# EAGLE board pcb_univ_3-2-(1-2)-x-rev1 (EAGLE 5.11)
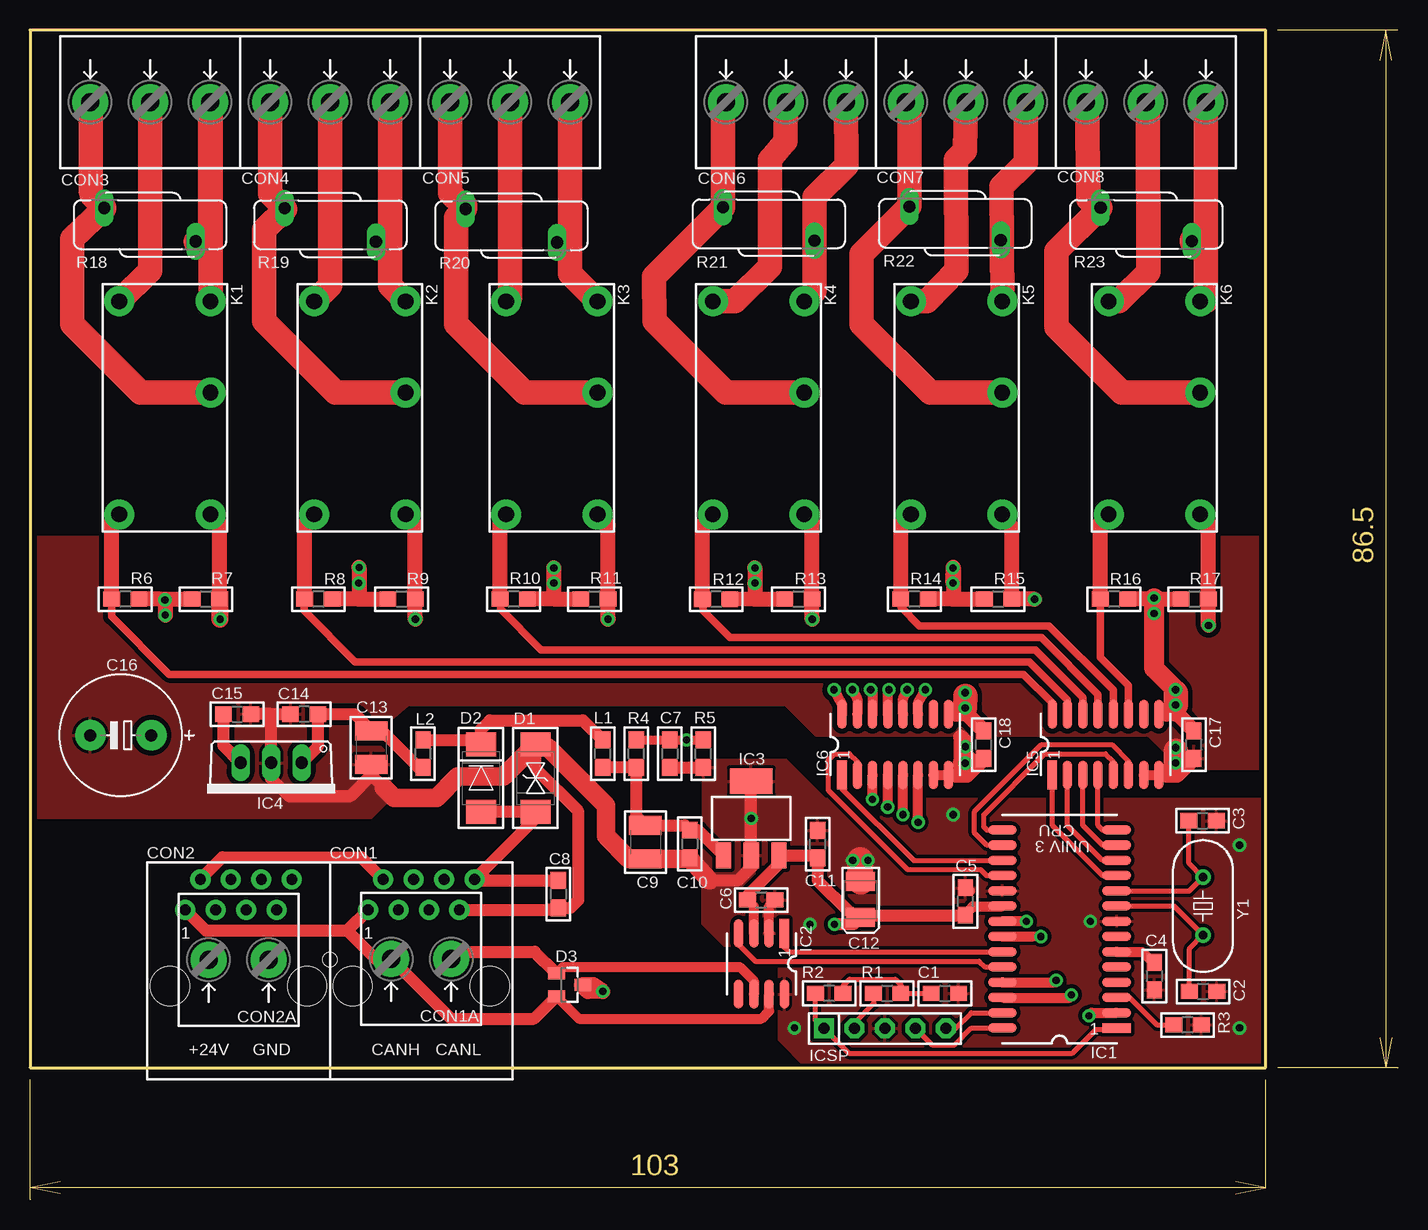
[diagram p0: board, top side]
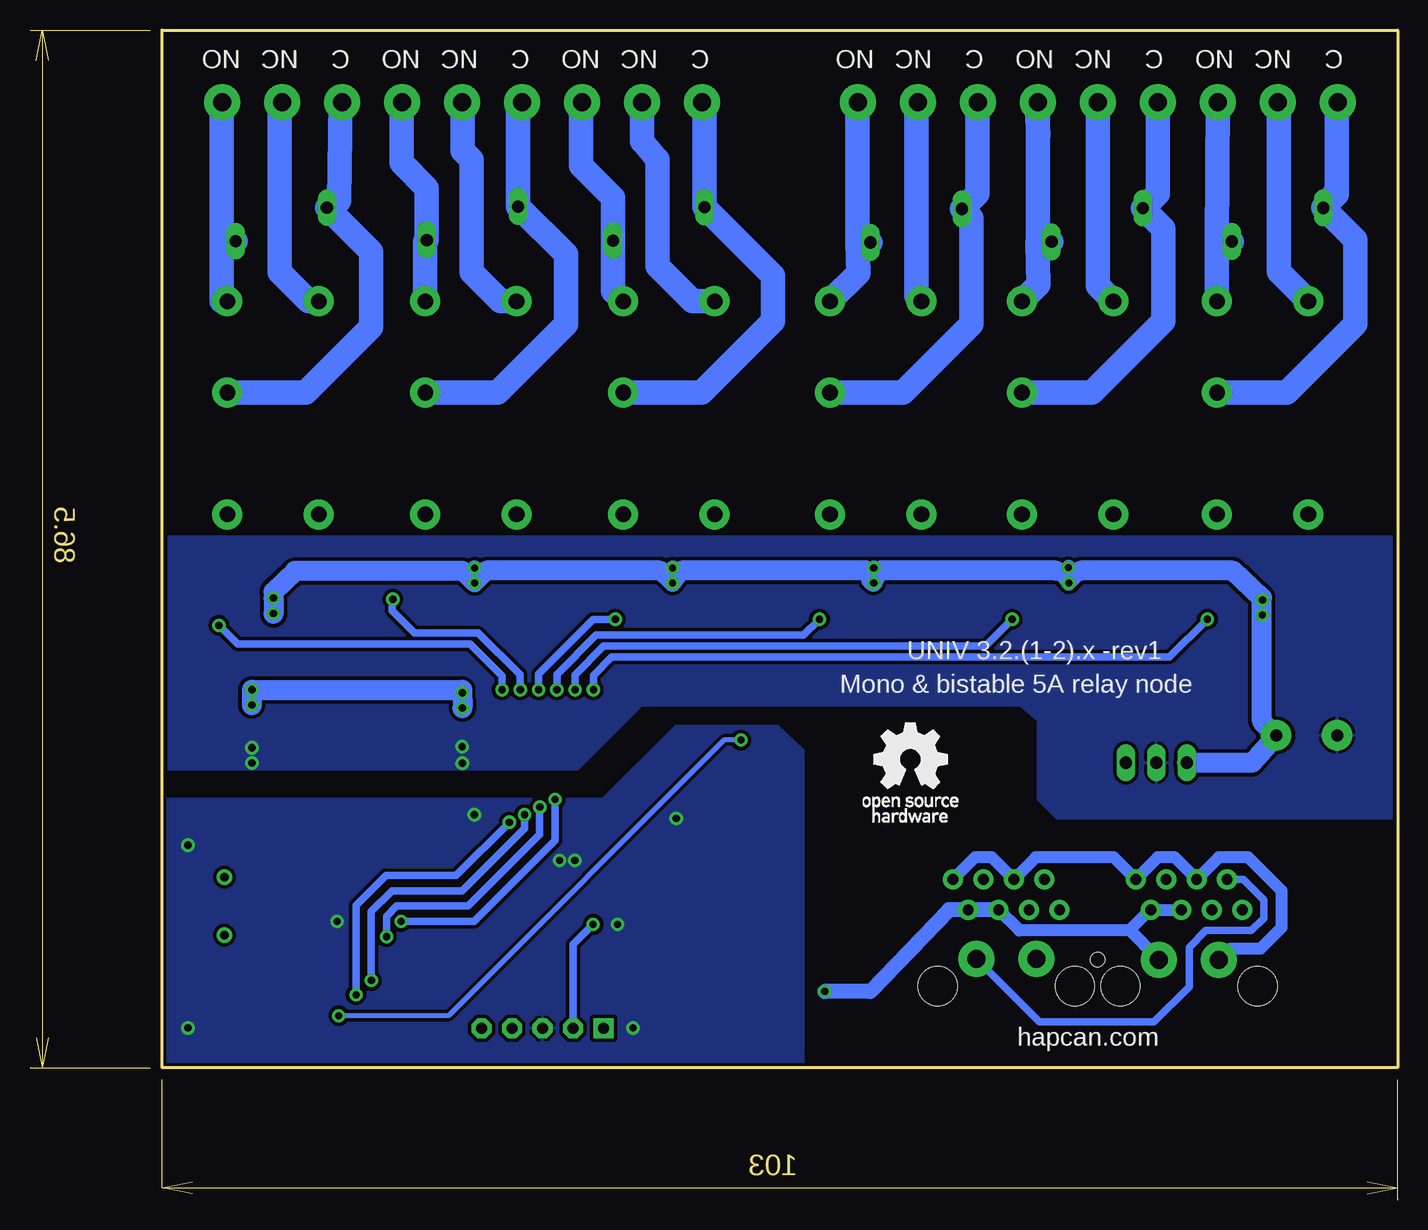
[diagram p1: board, bottom side, seen from below]

Size 114 x 97.5 mm. Coordinates in mm from the lower left corner, seen from the top.
Outline: 113.99,11 114,11 113,11
Outline: 113,11 104,11
Outline: 113,97.5 113,11
Outline: 114,97.5 113,97.5
Outline: 113,97.5 104,97.5
Outline: 113.5,95 113,97.5
Outline: 112.5,13.5 113,11
Outline: 113,97.5 112.5,95
Outline: 113.5,13.5 113,11
Outline: 0,0.01 0,0 0,1
Outline: 0,1 0,10
Outline: 103,1 0,1
Outline: 103,1 103,10
Outline: 100.5,0.5 103,1
Outline: 2.5,1.5 0,1
Outline: 103,1 100.5,1.5
Outline: 2.5,0.5 0,1
Outline: 0,11 103,11 103,97.5 0,97.5 0,11
Copper layers (1*16): Top 0.035mm / dielectric 1.5mm / Bottom 0.035mm
Design rules "hapcan_drc *": minimum track width 10mil, minimum drill 0.5mm, track to track 12mil, track to pad 12mil, pad to pad 12mil, via to via 12mil, smd to smd 0mil, copper to edge 10mil, drill to drill 8mil, minimum pad ring 10mil, minimum via ring 10mil, stop-mask expansion 4mil, vias tented up to drill 0mil, thermal gap 10mil
Holes 1.2 mm at 25,20
tKeepout: 4 lines

## Footprints (pad centres in the part's own frame; a part is rotated, then mirrored left to right if it is on the bottom)
0805 = smd 1.397 x 1.27: 1 -1.143,0; 2 1.143,0
1210 = smd 1.6 x 2.7: 1 -1.4,0; 2 1.4,0
SMC_B = smd 1.6 x 2.4: + -1.5,0; - 1.5,0
CAP-5X10.5 = drill 1.016 pad 2.54 round: + -2.54,0; - 2.54,0
RJ45-PCB-SOCKET = drill 0.9 pad 1.676 round: 1 -4.445,6.35; 2 -3.175,8.89; 3 -1.905,6.35; 4 -0.635,8.89; 5 0.635,6.35; 6 1.905,8.89; 7 3.175,6.35; 8 4.445,8.89 | hole 3.251: -5.715,0; 5.715,0
ARK2-5X10,5MM = drill 1.5 pad 3 round: 1 -2.5,0; 2 2.5,0
ARK3-5X10.5MM = drill 1.5 pad 3 round: 1 -5,0; 2 0,0; 3 5,0
DO-214_TRANSIL2 = smd 2 x 2.5: A 2.82,0; C -2.82,0
DO-214 = smd 2 x 2.5: A 2.82,0; C -2.82,0
SOT-23 = smd 1 x 1.4: 1 -0.95,-1.1; 2 0.95,-1.1; 3 0,1.1
UNIV3CPU = smd 2.4 x 0.8: 1 -4.763,8.255; 2 -4.763,6.985; 3 -4.763,5.715; 4 -4.763,4.445; 5 -4.763,3.175; 6 -4.763,1.905; 7 -4.763,0.635; 8 -4.763,-0.635; 9 -4.763,-1.905; 10 -4.763,-3.175; 11 -4.763,-4.445; 12 -4.763,-5.715; 13 -4.763,-6.985; 14 -4.763,-8.255; 15 4.763,-8.255; 16 4.763,-6.985; 17 4.763,-5.715; 18 4.763,-4.445; 19 4.763,-3.175; 20 4.763,-1.905; 21 4.763,-0.635; 22 4.763,0.635; 23 4.763,1.905; 24 4.763,3.175; 25 4.763,4.445; 26 4.763,5.715; 27 4.763,6.985; 28 4.763,8.255
SO-08 = smd 2.4 x 0.8: 1 -2.54,1.905; 2 -2.54,0.635; 3 -2.54,-0.635; 4 -2.54,-1.905; 5 2.54,-1.905; 6 2.54,-0.635; 7 2.54,0.635; 8 2.54,1.905
SOT-223 = smd 1.27 x 2.159: 1 -2.311,-3.099; 2 0,-3.099; 3 2.311,-3.099 | smd 3.556 x 2.159: 4 0,3.099
TO220V = drill 1.016 long: 1 -2.54,0; 2 0,0; 3 2.54,0
SO-16 = smd 2.4 x 0.8: 1 -2.54,4.445; 2 -2.54,3.175; 3 -2.54,1.905; 4 -2.54,0.635; 5 -2.54,-0.635; 6 -2.54,-1.905; 7 -2.54,-3.175; 8 -2.54,-4.445; 9 2.54,-4.445; 10 2.54,-3.175; 11 2.54,-1.905; 12 2.54,-0.635; 13 2.54,0.635; 14 2.54,1.905; 15 2.54,3.175; 16 2.54,4.445
SIP-5 = drill 0.9 pad 1.676 square: 1 -5.08,0 | drill 0.9 pad 1.676 octagon: 2 -2.54,0; 3 0,0; 4 2.54,0; 5 5.08,0
RELAY_PE = drill 1.3 pad 2.5 round: 11 -1.27,3.81; 12 -8.89,-3.81; 14 -8.89,3.81; A1 8.89,3.81; A2 8.89,-3.81
0805@1 = smd 1.397 x 1.27: 1 -1.143,0; 2 1.143,0
S10K = drill 1.016 long: 1 -1.397,-3.81; 2 1.397,3.81
CRYSTAL-HC49V = drill 0.7 pad 1.27 round: 1 -2.413,0; 2 2.413,0

## Placement (x,y rotation side)
C1  100n  [0805]  76.27,17.19 0 top
C2  22p  [0805]  97.79,17.35 0 top
C3  22p  [0805]  97.74,31.57 0 top
C4  10u/16V  [0805]  93.73,18.62 270 top
C5  100n  [0805]  77.98,24.85 90 top
C6  100n  [0805]  60.96,24.97 0 top
C7  100n  [0805]  53.34,37.16 270 top
C8  100n  [0805]  44.04,25.47 270 top
C9  10u/50V  [1210]  51.31,29.8 270 top
C10  100n  [0805]  55,29.65 270 top
C11  100n  [0805]  65.66,29.62 90 top
C12  10u/16V  [SMC_B]  69.24,25.02 90 top
C13  10u/50V  [1210]  28.45,37.67 270 top
C14  100n  [0805]  22.86,40.46 180 top
C15  100n  [0805]  17.27,40.46 0 top
C16  1000u/16V  [CAP-5X10.5]  7.57,38.7 180 top
C17  100n  [0805]  97.03,37.92 90 top
C18  100n  [0805]  79.5,37.92 90 top
CON1  [RJ45-PCB-SOCKET]  32.62,17.8 0 top
CON1A  TERMINAL-2  [ARK2-5X10,5MM]  32.62,20.06 180 top
CON2  [RJ45-PCB-SOCKET]  17.38,17.8 0 top
CON2A  TERMINAL-2  [ARK2-5X10,5MM]  17.38,19.99 180 top
CON3  TERMINAL-3-5X10.5MM  [ARK3-5X10.5MM]  10,91.5 0 top
CON4  TERMINAL-3-5X10.5MM  [ARK3-5X10.5MM]  25,91.5 0 top
CON5  TERMINAL-3-5X10.5MM  [ARK3-5X10.5MM]  40,91.5 0 top
CON6  TERMINAL-3-5X10.5MM  [ARK3-5X10.5MM]  63,91.5 0 top
CON7  TERMINAL-3-5X10.5MM  [ARK3-5X10.5MM]  78,91.5 0 top
CON8  TERMINAL-3-5X10.5MM  [ARK3-5X10.5MM]  93,91.5 0 top
D1  P6SMB33CA  [DO-214_TRANSIL2]  42.14,35.13 90 top
D2  S1D  [DO-214]  37.59,35.13 270 top
D3  PESD2CAN  [SOT-23]  44.98,17.9 270 top
IC1  UNIV 3 CPU  [UNIV3CPU]  85.83,22.56 180 top
IC2  MCP2561-E/SN  [SO-08]  60.98,19.66 270 top
IC3  MCP1790-5002EDB  [SOT-223]  60.12,31.77 0 top
IC4  7812  [TO220V]  20.09,36.41 180 top
IC5  ULN2003  [SO-16]  89.66,37.92 90 top
IC6  ULN2003  [SO-16]  72.14,37.92 90 top
ICSP  [SIP-5]  71.27,14.26 0 top
K1  [RELAY_PE]  11.25,66 270 top
K2  [RELAY_PE]  27.5,66 270 top
K3  [RELAY_PE]  43.5,66 270 top
K4  [RELAY_PE]  60.74,66 270 top
K5  [RELAY_PE]  77.25,66 270 top
K6  [RELAY_PE]  93.74,66 270 top
L1  BLM21A102SPT  [0805@1]  47.75,37.16 90 top
L2  BLM21A102SPT  [0805@1]  32.77,37.16 90 top
R1  10k  [0805]  71.45,17.19 0 top
R2  470R  [0805]  66.62,17.19 180 top
R3  10k  [0805]  96.5,14.56 180 top
R4  51k 1%  [0805]  50.55,37.16 90 top
R5  10k 1%  [0805]  56.13,37.16 90 top
R6  75R  [0805]  7.95,50.06 180 top
R7  75R  [0805]  14.67,50.06 0 top
R8  75R  [0805]  24.04,50.06 180 top
R9  75R  [0805]  30.98,50.06 0 top
R10  75R  [0805]  40.32,50.06 180 top
R11  75R  [0805]  47.05,50.06 0 top
R12  75R  [0805]  57.2,50.03 180 top
R13  75R  [0805]  64.06,50.06 0 top
R14  75R  [0805]  73.73,50.06 180 top
R15  75R  [0805]  80.7,50.06 0 top
R16  75R  [0805]  90.37,50.06 180 top
R17  75R  [0805]  97.09,50.06 0 top
R18  VAR10-250  [S10K]  10,81.27 270 top
R19  VAR10-250  [S10K]  25.03,81.24 270 top
R20  VAR10-250  [S10K]  40.12,81.19 270 top
R21  VAR10-250  [S10K]  61.59,81.34 270 top
R22  VAR10-250  [S10K]  77.11,81.39 270 top
R23  VAR10-250  [S10K]  93.05,81.29 270 top
Y1  8MHz  [CRYSTAL-HC49V]  97.79,24.46 90 top

## Library data of the parts
C1-C18 CON1 CON1A CON2 CON2A CON3-CON8 D1-D3 IC1-IC6 ICSP K1-K6 L1 L2 R1-R23 Y1 = HAPCAN_devices - UNIV3

## Nets
+5V: C5.1 C6.1 C11.1 C12.+ IC1.20 IC2.3 IC3.3 ICSP.2 R1.1
+12V: C15.1 C16.+ C17.2 C18.2 IC4.3 IC5.9 IC6.9 R6.1 R7.1 R8.1 R9.1 R10.1 R11.1 R12.1 R13.1 R14.1 R15.1 R16.1 R17.1
GND: C1.2 C2.2 C3.2 C4.2 C5.2 C6.2 C7.2 C8.2 C9.2 C10.2 C11.2 C12.- C13.2 C14.2 C15.2 C16.- C17.1 C18.1 CON1.5 CON1.7 CON2.5 CON2.7 CON2A.1 D1.A D3.3 IC1.8 IC1.19 IC2.2 IC2.8 IC3.2 IC3.4 IC4.2 IC5.7 IC5.8 IC6.7 IC6.8 ICSP.3 R3.1 R5.1
K1A1: IC6.16 K1.A1 R7.2
K1A2: IC5.16 K1.A2 R6.2
K2A1: IC6.15 K2.A1 R9.2
K2A2: IC5.15 K2.A2 R8.2
K3A1: IC6.14 K3.A1 R11.2
K3A2: IC5.14 K3.A2 R10.2
K4A1: IC6.13 K4.A1 R13.2
K4A2: IC5.13 K4.A2 R12.2
K5A1: IC6.12 K5.A1 R15.2
K5A2: IC5.12 K5.A2 R14.2
K6A1: IC6.11 K6.A1 R17.2
K6A2: IC5.11 K6.A2 R16.2
N$1: D2.C L1.2 L2.2
N$2: IC1.24 IC2.4
N$3: IC1.23 IC2.1
N$4: CON1.1 CON1A.2 CON2.1 D3.2 IC2.7
N$5: C9.1 C10.1 IC3.1 L1.1 R4.1
N$6: C13.1 C14.1 IC4.1 L2.1
N$7: C1.1 R1.2 R2.1
N$8: IC1.1 ICSP.1 R2.2
N$9: C8.1 CON1.4 CON1.8 CON2.4 CON2.8 CON2A.2 D1.C D2.A
N$10: IC1.28 ICSP.4
N$11: IC1.12 IC5.2
N$13: CON3.2 K1.12
N$14: IC1.27 ICSP.5
N$15: C3.1 IC1.10 Y1.2
N$16: C7.1 IC1.2 R4.2 R5.2
N$17: CON4.2 K2.12
N$18: IC1.11 IC5.1
N$19: IC1.13 IC5.3
N$20: CON5.2 K3.12
N$21: CON6.2 K4.12
N$22: IC1.14 IC5.4
N$23: CON7.2 K5.12
N$24: IC1.15 IC5.5
N$25: CON8.2 K6.12
N$26: IC1.3 R3.2
N$27: CON1.2 CON1A.1 CON2.2 D3.1 IC2.6
N$30: CON3.1 K1.11 R18.1
N$32: CON3.3 K1.14 R18.2
N$40: C2.1 IC1.9 Y1.1
N$45: IC1.16 IC5.6
N$46: IC1.17 IC6.1
N$47: IC1.18 IC6.2
N$51: CON4.3 K2.14 R19.2
N$52: CON5.3 K3.14 R20.2
N$53: CON6.3 K4.14 R21.2
N$54: CON7.3 K5.14 R22.2
N$55: CON8.3 K6.14 R23.2
N$56: C4.1 IC1.6
N$57: CON4.1 K2.11 R19.1
N$58: CON5.1 K3.11 R20.1
N$59: CON6.1 K4.11 R21.1
N$60: CON7.1 K5.11 R22.1
N$61: CON8.1 K6.11 R23.1
N$63: IC1.21 IC6.3
N$64: IC1.22 IC6.4
N$65: IC1.25 IC6.5
N$66: IC1.26 IC6.6

## Tracks (layer width: path | path; a pad name or v marks a point on that pad's centre or on a via)
+5V  (via drill 0.6)
  Top 0.406: ICSP.2 68.73,14.7 70.36,16.33 70.36,17.13 R1.1
  Top 0.813: C5.1 78.59,24.44 81.05,24.44 IC1.20 | IC2.3 60.34,24.45 C6.1
  Top 1.016: C12.+ 69.81,23.71 C5.1 | C6.1 59.82,25.35 62.43,27.96 IC3.3 65.46,28.68 C11.1 65.66,26.62 68.26,24.02 C12.+ | C12.+ 68.66,22.94 v67.06,22.94
  Bottom 0.61: v67.06,22.94 68.73,21.27 ICSP.2
+12V  (via drill 0.6, 0.6 pad 1.02)
  Top 0.61: 94.74,40.46 IC5.9 | 77.22,40.46 IC6.9 | 78.11,40.46 77.98,40.59 v77.95,40.97 | v95.5,41.23 95.5,40.46 | v77.95,42.24 77.95,42.01 77.98,41.99
  Top 1.016: IC4.3 16.13,37.84 C15.1
  Top 1.27: 27.41,50.05 R9.1 | 27.41,50.05 R8.1 | 43.66,50.07 R11.1 | 43.66,50.07 R10.1 | 60.43,50.05 R13.1 | 60.43,50.05 R12.1 | 76.91,50.05 R15.1 | 76.91,50.05 R14.1 | C17.2 95.63,40.46 95.5,40.46 94.74,40.46 | C18.2 78.11,40.46 77.22,40.46 | v27.43,52.69 27.43,50.17 27.41,50.05 | v43.66,52.66 v43.66,51.39 43.66,50.07 | v60.43,52.66 v60.43,51.39 60.43,50.05 | v76.94,51.39 76.94,51.65 76.96,52.69 76.96,50.17 76.91,50.05 | v11.25,49.99 v11.28,48.72 | R16.1 93.62,50.06 v93.7,50.14 93.78,50.06 R17.1 | R6.1 10.81,50.06 v11.25,49.99 | R7.1 10.98,50.06 v11.25,49.99
  Top 1.676: v93.7,50.14 v93.7,48.85 93.7,44.3 v95.5,42.5
  Top 2.032: v95.5,41.23 95.5,42.24 | v77.95,40.97 77.98,41.99
  Bottom 0.61: 93.73,50.66 93.73,50.16 v93.7,50.14 | 11.3,50.15 11.3,50.04 v11.25,49.99
  Bottom 1.27: v11.25,49.99 12.7,51.39 | 43.92,51.65 v43.66,52.66 | v60.43,52.66 60.43,51.65 60.45,51.42 | 28.45,52.43 28.19,52.43 v27.41,51.39 27.41,51.44 26.42,52.43 27.18,52.43 v27.43,52.69 | 76.89,51.49 76.96,51.66 v76.94,51.39 v76.94,52.66 76.89,52.6 76.89,51.49
  Bottom 1.524: 75.95,52.43 76.89,51.49 | 61.47,52.43 60.45,51.42 59.69,52.43 | 44.2,52.43 43.92,51.65 43.69,51.42 43.18,52.43 | v76.94,51.39 77.95,52.4
  Bottom 1.676: v77.95,40.97 77.98,42.5 v95.5,42.5 v95.5,41.23 | 61.47,52.43 75.95,52.43 | 44.2,52.43 59.69,52.43 | 28.45,52.43 43.18,52.43 | 26.42,52.43 13.72,52.43 11.3,50.15 11.3,39.86 C16.+ 12.14,36.41 IC4.3 | v93.7,50.14 93.7,48.82 | 93.73,50.66 91.92,52.4 77.95,52.4
GND  (via drill 0.6)
  Top 0.406: C1.2 77.42,17.04
  Top 0.61: IC6.8 77.22,35.38 | IC5.8 94.74,35.38 | 78.11,35.38 77.98,35.51 78,36.48 | 95.63,35.38 95.25,35.77 95.5,36.15
  Top 0.813: C5.2 78.39,25.71 | IC2.2 61.61,24.48 C6.2 | IC6.7 IC6.8 | IC5.7 IC5.8
  Top 1.016: CON1.7 43.1,24.15 C8.2 45.07,24.32 45.72,24.97 45.72,32.34 42.16,35.89 42.16,37.93 D1.A 42.42,37.67 43.18,37.67 | IC3.4 IC3.2 60.2,28.59 60.2,27.76 59.05,26.62 56.64,26.62 | 51.18,28.53 C9.2 | 54.89,28.4 C10.2 55,28.39 | 20.07,40.46 C15.2 | 20.07,40.46 C14.2 | 20.07,40.46 20.09,40.44 IC4.2 20.09,35.1 21.59,33.61 26.67,33.61 28.45,35.38 | 29.46,34.37 28.45,35.38 | 28.45,35.38 C13.2 | C7.2 R5.1
  Top 1.27: C18.1 78.11,35.38 77.22,35.38 | C17.1 95.63,35.38 94.74,35.38 | D3.3 46.95,17.9 v47.75,17.35 46.48,17.35 45.97,17.86 | v77.95,36.38 77.95,38.2 77.6,38.56 77.6,36.25
  Top 1.524: C9.2 54.89,28.4 | 55,28.39 56.64,26.62 | 43.18,37.67 48.01,32.84 48.01,30.3 49.91,28.4 C9.2 | 29.46,34.37 30.35,33.48 33.88,33.48 35.66,35.26 39.47,35.26 39.47,35.28 D1.A
  Top 2.032: 78,36.48 v77.95,36.38 | 95.5,36.15 v95.5,36.4 95.5,37.42
  Top 2.184: C12.- 69.22,27.05 69.22,28.27
  Bottom 1.016: 22.35,22.43 22.27,22.43 20.09,20.25 CON2A.1 | 22.35,22.43 31.54,22.43 CON1.5 CON1.7 | CON2.5 CON2.7 20.63,24.15 22.35,22.43
  Bottom 1.27: CON1.5 37.4,24.15 43.94,17.35 v47.75,17.35
  other vias: 95.5,37.67 65.02,22.94 76.96,32.08 68.58,28.27 69.85,28.27 100.84,29.54 100.84,14.3 60.12,31.78 88.39,23.19 77.98,37.75 63.73,14.3
  pour Top: 103,11 64.75,11 62.46,13.29 62.46,21.16 57.89,21.16 56.11,22.94 56.13,36.65 62.99,36.68 66.22,33.43 103.17,33.4
  pour Bottom: 103,11 49.53,11 49.53,37.45 51.64,39.45 60.2,39.45 66.29,33.35 103,33.35
  pour Top (isolate 0.406): 0,31.83 0,55.23 103,55.23 103,35.89 96.01,35.89 93.22,38.69 65.53,38.69 62.99,41.23 31.5,41.23 29.97,39.96 29.97,33.35 28.45,31.83
  pour Bottom (isolate 0.305): 103,36.7 103.02,35.89 68.33,35.89 62.99,41.23 31.5,41.23 29.97,39.96 29.97,33.35 28.45,31.83 0,31.83 0,55.23 103,55.25
K1A1  (via drill 0.6, 0.6 pad 1.02)
  Top 0.61: 15.85,50.02 R7.2
  Top 0.813: IC6.16 67.69,41.25 v67.03,42.5
  Top 1.27: R7.2 15.82,56.35 K1.A1
  Top 1.422: v15.85,48.37 15.85,50.02
  Bottom 0.61: v15.85,48.37 19.01,45.21 65.51,45.21 67.03,43.69 v67.03,42.5
K1A2
  Top 0.61: IC5.16 85.22,41.41 82.83,43.79 11.61,43.79 6.8,48.6 R6.2
  Top 1.27: R6.2 6.8,56.48 K1.A2
K2A1  (via drill 0.6, 0.6 pad 1.02)
  Top 0.813: IC6.15 68.96,41.71 v68.56,42.5
  Top 1.27: K2.A1 32.12,56.3 R9.2 32.12,48.51 v32.13,48.37
  Bottom 0.61: v32.13,48.37 34.37,46.13 66.17,46.13 68.56,43.74 v68.56,42.5
K2A2
  Top 0.61: R8.2 22.84,49.99 22.84,49.1 27.12,44.81 83.31,44.81 86.49,41.64 IC5.15
  Top 1.27: R8.2 22.9,56.32 K2.A2
K3A1  (via drill 0.6, 0.6 pad 1.02)
  Top 0.813: IC6.14 70.23,42.34 v70.08,42.5
  Top 1.27: K3.A1 48.2,56.22 R11.2 48.2,48.43 v48.18,48.37
  Bottom 0.61: v70.08,42.5 70.08,43.77 66.8,47.04 49.51,47.04 v48.18,48.37
K3A2
  Top 0.61: IC5.14 87.76,41.86 83.82,45.83 42.62,45.83 39.22,49.23 39.22,50.02 R10.2
  Top 1.27: R10.2 39.18,56.6 K3.A2
K4A1  (via drill 0.6)
  Top 0.813: IC6.13 71.5,42.39 v71.6,42.5
  Top 1.27: K4.A1 65.2,56.45 R13.2 65.2,48.44 v65.2,48.37
  Bottom 0.61: v65.2,48.37 67.06,48.37 71.6,43.82 v71.6,42.5
K4A2
  Top 0.61: IC5.13 89.03,42.11 84.33,46.85 58.36,46.85 56.11,49.1 56.11,49.98 R12.2
  Top 1.27: R12.2 56.06,56.24 K4.A2
K5A1  (via drill 0.6)
  Top 0.813: IC6.12 72.77,41.76 v73.13,42.5
  Top 1.27: K5.A1 81.84,56.07 R15.2 83.66,50.06 v83.74,50.05
  Bottom 0.61: v83.74,50.05 83.8,49.99 83.8,49.1 81.94,47.25 76.63,47.25 73.13,43.77 v73.13,42.5
K5A2
  Top 0.61: IC5.12 90.3,42.47 84.94,47.83 74.14,47.83 72.59,49.39 R14.2
  Top 1.27: R14.2 72.59,56.26 K5.A2
K6A1  (via drill 0.6)
  Top 0.813: IC6.11 74.04,41.38 v74.65,42.5
  Top 1.27: K6.A1 98.23,56.42 R17.2 98.23,47.92 v98.25,47.86
  Bottom 0.61: v98.25,47.86 96.69,46.31 77.29,46.31 74.65,43.66 v74.65,42.5
K6A2
  Top 0.61: IC5.11 91.57,42.85 89.22,45.2 R16.2
  Top 1.27: R16.2 89.22,56.41 K6.A2
N$1
  Top 1.016: L2.2 37.24,38.3 D2.C 37.59,39.19 38.35,39.96 46.1,39.96 L1.2
N$2
  Top 0.406: IC2.4 59.07,21.27 60.47,19.87 79.12,19.87 79.61,19.38 IC1.24
N$3
  Top 0.406: IC2.1 62.74,22.05 62.74,21.16 63.27,20.63 63.28,20.65 IC1.23
N$4
  Top 0.813: IC2.7 61.61,15.71 60.96,15.06 45.77,15.06 D3.2
  Top 1.016: D3.2 42,15.06 35.11,15.06 CON1A.2 28.83,20.06 26.45,22.43 | 26.45,22.43 CON1.1 | 26.45,22.43 14.65,22.43 CON2.1
N$5
  Top 1.016: L1.1 R4.1 50.55,31.96 C9.1 54.6,31.2 C10.1 55.69,30.8 IC3.1
N$6
  Top 1.016: 24,40.34 C14.1 | IC4.1 24,37.78 24,40.34 | L2.1 32.39,36.02 29.46,38.94 28.58,38.94 C13.1 27.05,40.46 23.88,40.46 24,40.34
N$7
  Top 0.406: C1.1 R1.2 72.59,17.91 72.14,18.37 68.33,18.37 67.82,17.86 67.82,17.25 R2.1
N$8
  Top 0.406: R2.2 65.48,14.97 ICSP.1 68.26,12.19 86.89,12.19 88.88,14.18 90.47,14.18 IC1.1
N$9
  Top 1.016: C8.1 37.15,26.61 CON1.8 | CON1.8 37.82,26.94 | 42.11,32.34 42.27,32.34 42.27,31.89 CON1.8 | 42.01,32.21 42.01,32.34 42.11,32.34 | D2.A D1.C 42.11,32.34
  Bottom 1.016: CON1.8 35.23,28.53 33.82,28.53 CON1.4 30.15,28.53 23.66,28.53 CON2.8 19.99,28.53 18.58,28.53 CON2.4 14.91,28.53 12.45,28.53 9.65,25.73 9.65,22.68 11.43,20.91 13.97,20.91 CON2A.2 14.63,19.99
N$10
  Top 0.406: ICSP.4 75.17,12.9 77.09,12.9 78.49,14.3 IC1.28
N$11
  Top 0.406: IC5.2 86.49,31.19 89.41,28.27 IC1.12
N$13
  Top 2.032: CON3.2 10,77.45 K1.12
  Bottom 2.032: K1.12 9.88,77.34 9.88,91.52
N$14
  Top 0.406: ICSP.5 77.15,14.26 78.46,15.57 IC1.27
N$15
  Top 0.406: C3.1 96.6,28.07 Y1.2 96.63,25.71 90.61,25.71 IC1.10
N$16  (via drill 0.6)
  Top 0.406: 90.56,15.57 IC1.2
  Top 0.762: R5.2 v54.74,38.3 C7.1 R4.2
  Top 0.813: 90.56,15.57 88.52,15.57 v88.27,15.32
  Bottom 0.406: v88.27,15.32 79.12,15.32 R5.2 v54.74,38.3
N$17
  Top 2.032: CON4.2 25,76.2 K2.12
  Bottom 2.032: K2.12 25,76.17 25,90.98 25.12,91.52
N$18
  Top 0.406: IC5.1 85.22,31.19 89.41,27 IC1.11
N$19
  Top 0.406: IC5.3 87.76,31.19 89.41,29.54 IC1.13
N$20
  Top 2.032: CON5.2 40,75.2 K3.12
  Bottom 2.032: K3.12 40.11,75.31 40.11,91.52
N$21
  Top 2.032: CON6.2 62.97,88.22 61.7,86.69 61.68,77.76 58.78,74.88 K4.12
  Bottom 2.032: K4.12 58.79,74.89 61.7,77.8 61.7,86.69 62.97,88.22 62.97,91.52
N$22
  Top 0.406: IC5.4 89.03,31.19 89.41,30.81 IC1.14
N$23
  Top 2.032: CON7.2 77.95,87.45 77.19,86.69 77.24,77.42 74.78,74.91 K5.12
  Bottom 2.032: K5.12 74.79,74.89 77.19,77.29 77.19,86.69 77.95,87.45 77.95,91.52
N$24
  Top 0.406: IC5.5 90.3,36.53 89.66,37.16 84.58,37.16 79.5,32.08 79.5,31.07 79.76,30.81 IC1.15
N$25
  Top 2.032: CON8.2 93.19,90.5 93.21,77.31 90.78,74.88 K6.12
  Bottom 2.032: K6.12 90.79,74.89 93.19,77.29 93.19,91.52
N$26
  Top 0.406: R3.2 93.96,14.56 91.69,16.82 90.61,16.82 IC1.3
N$27
  Top 0.406: CON1.2 30.03,26.69
  Top 0.813: IC2.6 60.34,18.22 59.18,19.38 44.42,19.38 D3.1
  Top 1.016: D3.1 42.08,20.65 35.72,20.65 CON1A.1 | CON2.2 16.04,28.53 27.61,28.53 CON1.2
  Bottom 0.61: CON1A.1 29.87,14.81 20.3,14.81 17.38,17.73 17.38,21.03 15.98,22.43 12.17,22.43 11.15,23.45 11.15,24.97 12.87,26.69 CON2.2
N$30
  Top 2.032: CON3.1 5,91.21 5.06,91.26 5.08,84.06 5.14,83.72 | 5.14,83.72 6.17,82.63 | K1.11 9.24,67.27 3.53,72.98 3.53,80.09 6.17,82.66 6.17,82.69 5.14,83.72
  Bottom 2.032: K1.11 9.24,67.27 3.53,72.98 3.53,80.01 R18.1 | R18.1 5.06,84.06 5.06,85.42 | 5.06,91.52 5.06,83.8 R18.1
N$32
  Top 2.032: K1.14 arc-90 15.08,74.87 15.08,91.58 CON3.3 15,79.87 R18.2
  Bottom 2.032: 15.04,79.84 15.08,74.87 | 15.04,79.84 14.96,91.52 | R18.2 15.01,79.87 15.04,79.84
N$40
  Top 0.406: C2.1 96.65,20.91 Y1.1 95.4,24.44 90.61,24.44 IC1.9
N$45
  Top 0.406: IC5.6 91.57,36.53 90.17,37.92 84.33,37.92 78.74,32.34 78.74,30.56 79.78,29.52 79.84,29.52 79.86,29.54 IC1.16
N$46
  Top 0.406: IC6.1 67.69,34.24 73.68,28.25 81.05,28.25 IC1.17
N$47
  Top 0.406: IC6.2 68.96,36.53 68.33,37.16 67.06,37.16 66.55,36.65 66.55,34.11 73.15,27.51 79.25,27.51 79.78,26.98 79.79,27 IC1.18
N$51
  Top 2.032: CON4.3 30,76.2 K2.14
  Bottom 2.032: K2.14 30.11,76.09 29.95,76.28 30.02,79.81 R19.2 29.95,79.83 30,79.83 30,91.09 30.11,91.42 29.95,88.72
N$52
  Top 2.032: CON5.3 45,77.2 K3.14
  Bottom 2.032: K3.14 44.95,77.25 45.01,79.76 R20.2 45.01,79.83 45.03,91.56 44.93,91.52
N$53
  Top 2.032: CON6.3 68.05,86.18 65.41,83.54 65.41,75.73 K4.14
  Bottom 2.032: K4.14 65.4,75.74 R21.2 65.4,83.53 68.05,86.18 68.05,91.52
N$54
  Top 2.032: CON7.3 83.03,86.44 80.97,84.45 K5.14
  Bottom 2.032: K5.14 81.06,79.86 R22.2 80.92,84.33 83.03,86.44 83.03,91.52
N$55
  Top 2.032: 97.47,74.89 K6.14 98.02,74.89 98.02,75.26 98.01,79.83 96.85,79.83 96.85,79.96 97.94,79.94 98.03,79.99 CON8.3
  Bottom 2.032: R23.2 98,79.97 98.02,84.66 | 98.02,84.66 98.02,91.52 | 98.02,84.66 98.02,74.89 K6.14
N$56
  Top 0.813: C4.1 93.73,19.64 92.73,20.63 90.61,20.63 IC1.6
N$57
  Top 2.032: K2.11 25.49,67.27 19.53,73.23 19.53,80.85 21.26,82.58 20,83.84 CON4.1
  Bottom 2.032: K2.11 25.49,67.27 19.53,73.23 19.53,80.95 R19.1 19.99,83.87 19.99,91.52
N$58
  Top 2.032: CON5.1 35.03,83.9 36.04,82.88 36.27,82.88 36.27,82.6 35.54,81.87 35.54,72.98 41.24,67.27 K3.11
  Bottom 2.032: K3.11 41.24,67.27 35.54,72.98 35.54,81.81 R20.1 35.03,83.87 35.03,91.52
N$59
  Top 2.032: CON6.1 58,91.38 57.76,91.59 57.76,82.7 52.03,76.95 52.06,73.23 52.22,73.06 58.02,67.26 K4.11
  Bottom 2.032: K4.11 58.01,67.27 52.05,73.23 52.05,77 R21.1 57.78,90.65 57.89,91.52
N$60
  Top 2.032: CON7.1 73.31,90.88 73.33,82.83 69.32,78.81 69.32,72.98 75.06,67.26 K5.11
  Bottom 2.032: K5.11 75.02,67.27 69.32,72.98 69.32,78.8 R22.1 73.3,91.09 73.13,91.52
N$61
  Top 2.032: CON8.1 88.11,91.52 88.24,83.42 89.23,82.7 85.57,79.07 85.57,72.72 91,67.29 K6.11
  Bottom 2.032: K6.11 91.03,67.27 85.57,72.72 85.57,79.02 R23.1 88.23,83.28 88.11,91.52
N$63  (via drill 0.6)
  Top 0.813: 83.04,23.17 v83.06,23.19 IC1.21 | v70.23,33.35 IC6.3
  Bottom 0.61: v70.23,33.35 70.23,29.92 76.96,23.19 v83.06,23.19
N$64  (via drill 0.6)
  Top 0.813: v84.28,21.92 83.55,21.9 81.08,21.9 IC1.22 | v71.5,32.72 IC6.4
  Bottom 0.61: v71.5,32.72 71.5,30.43 77.47,24.46 83.44,24.46 84.28,23.62 v84.28,21.92
N$65  (via drill 0.6)
  Top 0.813: v85.55,18.26 85.5,18.09 81.08,18.09 IC1.25 | v72.77,32.08 IC6.5
  Bottom 0.61: v72.77,32.08 72.77,30.94 77.98,25.73 83.82,25.73 85.55,24.01 v85.55,18.26
N$66  (via drill 0.6)
  Top 0.813: v74.04,31.45 IC6.6 | v86.82,17.07 arc-90 86.57,16.82 81.08,16.82 IC1.26
  Bottom 0.61: v74.04,31.45 78.49,27 84.33,27 86.82,24.51 v86.82,17.07

## Text on the board
Dimension: 86.5 | 103
tPlace: +24V | GND | CANH | CANL
bPlace: C | NC | NO | C | NC | NO | C | NC | NO | C | NC | NO | C | NC | NO | C | NC | NO | UNIV 3.2.(1-2).x -rev1 | Mono & bistable 5A relay node | hapcan.com